# EAGLE board 04A-010-A101 (EAGLE 9.6.2)
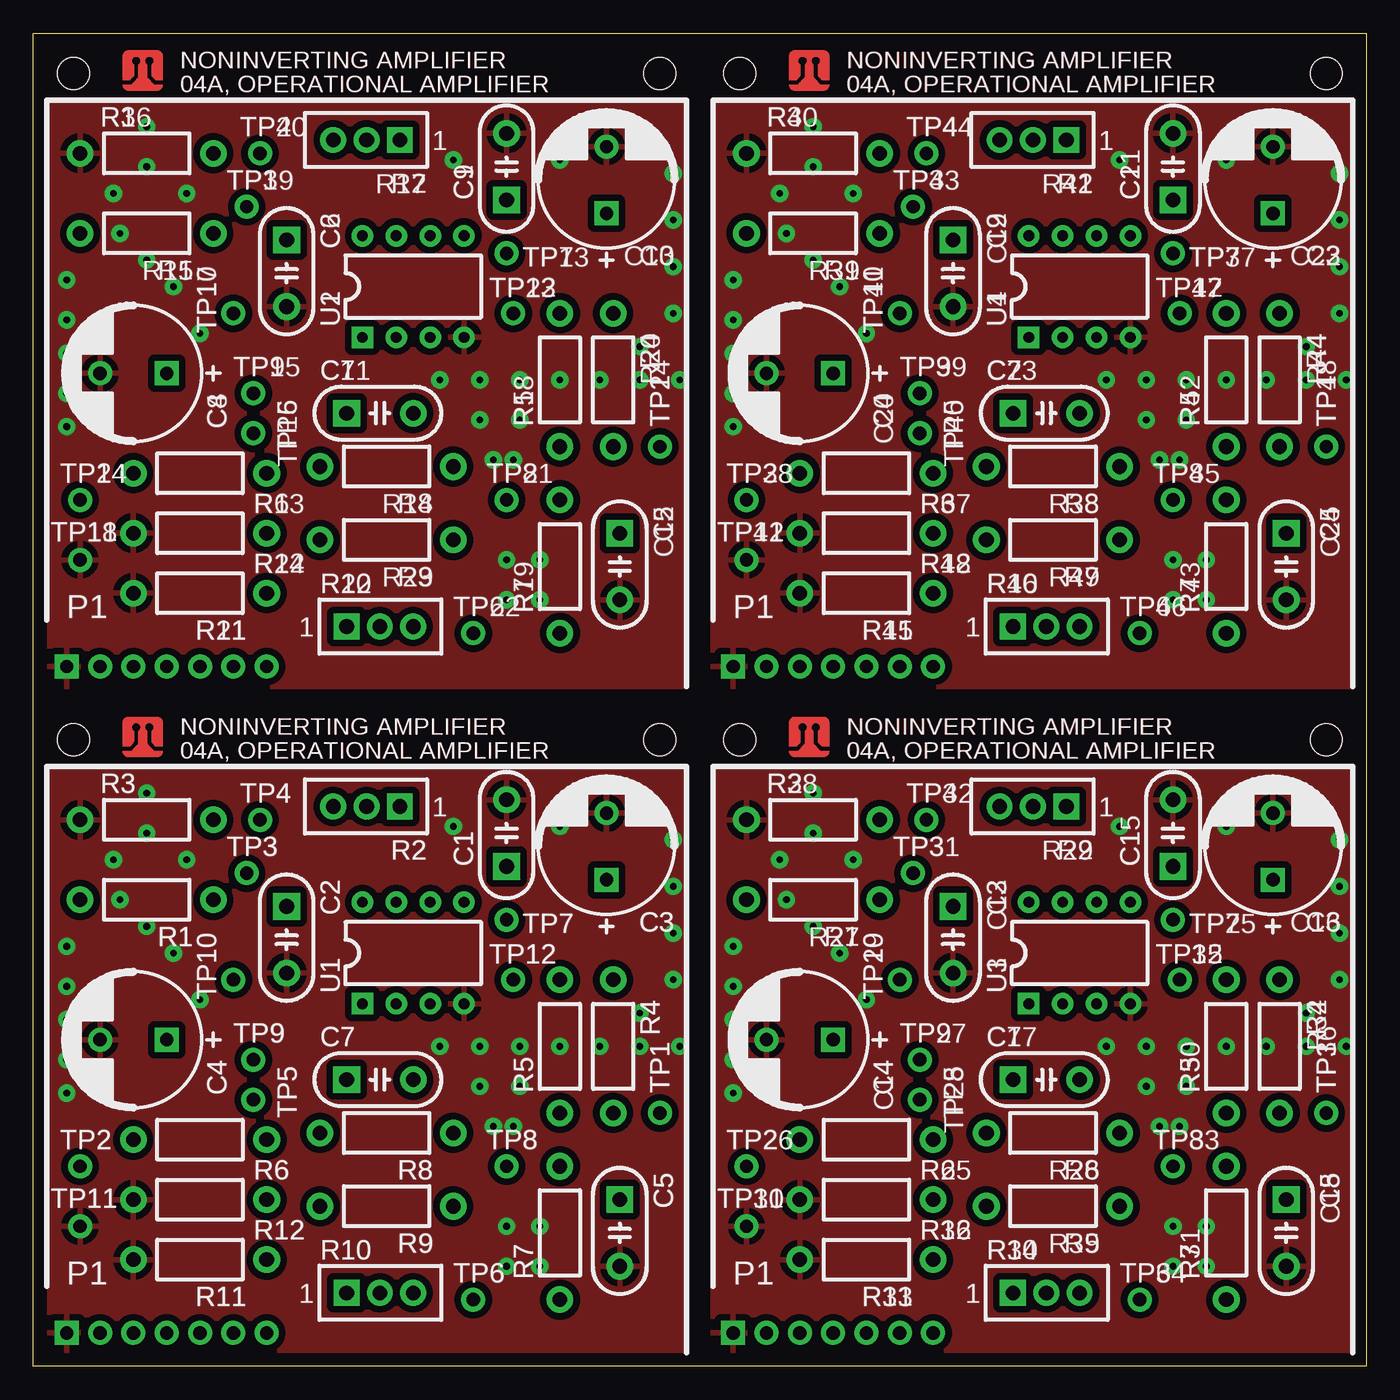
[diagram p0: board, top side]
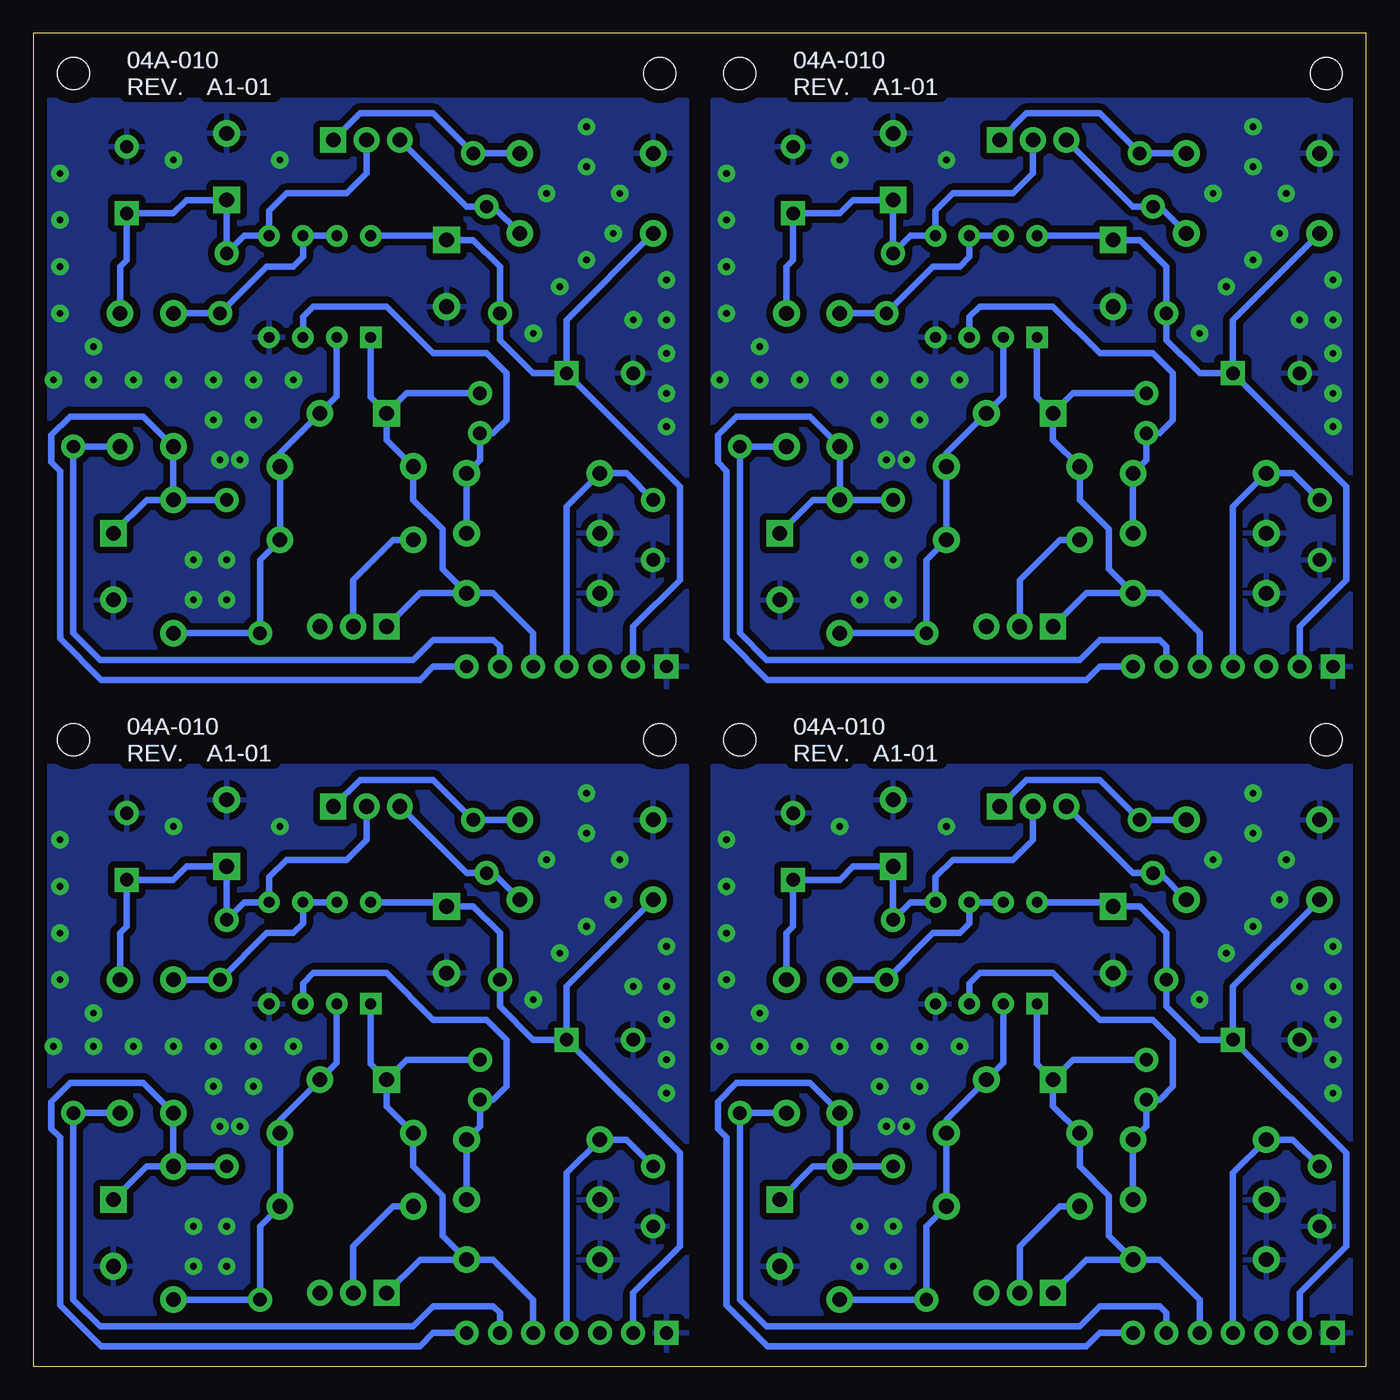
[diagram p1: board, bottom side, seen from below]

Size 100 x 100 mm. Coordinates in mm from the lower left corner, seen from the top.
Outline: 0,0 0,100 100,100 100,0 0,0
Copper layers (1*16): Top 0.035mm / dielectric 1.5mm / Bottom 0.035mm
Design rules "minipcb-THD": minimum track width 0.5mm, minimum drill 0.5mm, track to track 0.5mm, track to pad 0.5mm, pad to pad 0.5mm, via to via 0.5mm, smd to smd 0mil, copper to edge 1mm, drill to drill 1mm, minimum pad ring 0.4mm, minimum via ring 0.4mm, stop-mask expansion 0.1mm, vias tented up to drill 0.6mm, thermal gap 0.5mm

## Footprints (pad centres in the part's own frame; a part is rotated, then mirrored left to right if it is on the bottom)
C050-024X044 = drill 1.1 pad 2 square: 1 -2.5,0 | drill 1.1 pad 2: 2 2.5,0
C5MM = drill 1 square: + -2.5,0 | drill 1: - 2.5,0
PINS_1X7 = drill 1 square: 1 0,0 | drill 1: 2 2.5,0; 3 5,0; 4 7.5,0; 5 10,0; 6 12.5,0; 7 15,0
0207/10 = drill 1.1 pad 2: 1 -5,0; 2 5,0
TRIM_0100 = drill 1.1 pad 1.93 square: 1 0,0 | drill 1.1 pad 1.93: 2 2.5,0; 3 5,0
PINS_1_TESTPOINT_KE5000_NOTEXT = drill 1: 1 0,0
DIL08 = drill 0.813 square: 1 -3.81,-3.81 | drill 0.813: 2 -1.27,-3.81; 3 1.27,-3.81; 4 3.81,-3.81; 5 3.81,3.81; 6 1.27,3.81; 7 -1.27,3.81; 8 -3.81,3.81
MINIPCB_0P_50X50MM = hole 2.4: 47,47; 3,47

## Placement (x,y rotation side)
C1  [C050-024X044]  35.5,40 90 top
C2  [C050-024X044]  19,32 270 top
C3  [C5MM]  43,39 90 top
C4  [C5MM]  7.5,24.5 180 top
C5  [C050-024X044]  44,10 270 top
C6  [C050-024X044]  19,82 270 top
C7  [C050-024X044]  26,21.5 0 top
C8  [C5MM]  7.5,74.5 180 top
C9  [C050-024X044]  35.5,90 90 top
C10  [C5MM]  43,89 90 top
C11  [C050-024X044]  26,71.5 0 top
C12  [C050-024X044]  44,60 270 top
C13  [C050-024X044]  69,32 270 top
C14  [C5MM]  57.5,24.5 180 top
C15  [C050-024X044]  85.5,40 90 top
C16  [C5MM]  93,39 90 top
C17  [C050-024X044]  76,21.5 0 top
C18  [C050-024X044]  94,10 270 top
C19  [C050-024X044]  69,82 270 top
C20  [C5MM]  57.5,74.5 180 top
C21  [C050-024X044]  85.5,90 90 top
C22  [C5MM]  93,89 90 top
C23  [C050-024X044]  76,71.5 0 top
C24  [C050-024X044]  94,60 270 top
E$1  [MINIPCB_PANEL_IMAGEFRAME]  -25,-30 0 top  (outside the outline)
P1  [PINS_1X7]  2.5,2.5 0 top
P2  [PINS_1X7]  2.5,52.5 0 top
P3  [PINS_1X7]  52.5,2.5 0 top
P4  [PINS_1X7]  52.5,52.5 0 top
R1  [0207/10]  8.5,35 180 top
R2  [TRIM_0100]  27.5,42 180 top
R3  [0207/10]  8.5,41 0 top
R4  [0207/10]  43.5,24 270 top
R5  [0207/10]  39.5,24 90 top
R6  [0207/10]  12.5,17 180 top
R7  [0207/10]  39.5,10 90 top
R8  [0207/10]  26.5,17.5 180 top
R9  [0207/10]  26.5,12 180 top
R10  [TRIM_0100]  23.5,5.5 0 top
R11  [0207/10]  12.5,8 180 top
R12  [0207/10]  12.5,12.5 180 top
R13  [0207/10]  12.5,67 180 top
R14  [0207/10]  26.5,67.5 180 top
R15  [0207/10]  8.5,85 180 top
R16  [0207/10]  8.5,91 0 top
R17  [TRIM_0100]  27.5,92 180 top
R18  [0207/10]  39.5,74 90 top
R19  [0207/10]  39.5,60 90 top
R20  [0207/10]  43.5,74 270 top
R21  [0207/10]  12.5,58 180 top
R22  [TRIM_0100]  23.5,55.5 0 top
R23  [0207/10]  26.5,62 180 top
R24  [0207/10]  12.5,62.5 180 top
R25  [0207/10]  62.5,17 180 top
R26  [0207/10]  76.5,17.5 180 top
R27  [0207/10]  58.5,35 180 top
R28  [0207/10]  58.5,41 0 top
R29  [TRIM_0100]  77.5,42 180 top
R30  [0207/10]  89.5,24 90 top
R31  [0207/10]  89.5,10 90 top
R32  [0207/10]  93.5,24 270 top
R33  [0207/10]  62.5,8 180 top
R34  [TRIM_0100]  73.5,5.5 0 top
R35  [0207/10]  76.5,12 180 top
R36  [0207/10]  62.5,12.5 180 top
R37  [0207/10]  62.5,67 180 top
R38  [0207/10]  76.5,67.5 180 top
R39  [0207/10]  58.5,85 180 top
R40  [0207/10]  58.5,91 0 top
R41  [TRIM_0100]  77.5,92 180 top
R42  [0207/10]  89.5,74 90 top
R43  [0207/10]  89.5,60 90 top
R44  [0207/10]  93.5,74 270 top
R45  [0207/10]  62.5,58 180 top
R46  [TRIM_0100]  73.5,55.5 0 top
R47  [0207/10]  76.5,62 180 top
R48  [0207/10]  62.5,62.5 180 top
TP1  [PINS_1_TESTPOINT_KE5000_NOTEXT]  47,19 0 top
TP2  [PINS_1_TESTPOINT_KE5000_NOTEXT]  3.5,15 0 top
TP3  [PINS_1_TESTPOINT_KE5000_NOTEXT]  16,37 0 top
TP4  [PINS_1_TESTPOINT_KE5000_NOTEXT]  17,41 0 top
TP5  [PINS_1_TESTPOINT_KE5000_NOTEXT]  16.5,20 270 top
TP6  [PINS_1_TESTPOINT_KE5000_NOTEXT]  33,5 0 top
TP7  [PINS_1_TESTPOINT_KE5000_NOTEXT]  35.5,33.5 180 top
TP8  [PINS_1_TESTPOINT_KE5000_NOTEXT]  35.5,15 0 top
TP9  [PINS_1_TESTPOINT_KE5000_NOTEXT]  16.5,23 0 top
TP10  [PINS_1_TESTPOINT_KE5000_NOTEXT]  15,29 90 top
TP11  [PINS_1_TESTPOINT_KE5000_NOTEXT]  3.5,10.5 0 top
TP12  [PINS_1_TESTPOINT_KE5000_NOTEXT]  36,29 270 top
TP13  [PINS_1_TESTPOINT_KE5000_NOTEXT]  35.5,83.5 180 top
TP14  [PINS_1_TESTPOINT_KE5000_NOTEXT]  3.5,65 0 top
TP15  [PINS_1_TESTPOINT_KE5000_NOTEXT]  16.5,73 0 top
TP16  [PINS_1_TESTPOINT_KE5000_NOTEXT]  16.5,70 270 top
TP17  [PINS_1_TESTPOINT_KE5000_NOTEXT]  15,79 90 top
TP18  [PINS_1_TESTPOINT_KE5000_NOTEXT]  3.5,60.5 0 top
TP19  [PINS_1_TESTPOINT_KE5000_NOTEXT]  16,87 0 top
TP20  [PINS_1_TESTPOINT_KE5000_NOTEXT]  17,91 0 top
TP21  [PINS_1_TESTPOINT_KE5000_NOTEXT]  35.5,65 0 top
TP22  [PINS_1_TESTPOINT_KE5000_NOTEXT]  33,55 0 top
TP23  [PINS_1_TESTPOINT_KE5000_NOTEXT]  36,79 270 top
TP24  [PINS_1_TESTPOINT_KE5000_NOTEXT]  47,69 0 top
TP25  [PINS_1_TESTPOINT_KE5000_NOTEXT]  85.5,33.5 180 top
TP26  [PINS_1_TESTPOINT_KE5000_NOTEXT]  53.5,15 0 top
TP27  [PINS_1_TESTPOINT_KE5000_NOTEXT]  66.5,23 0 top
TP28  [PINS_1_TESTPOINT_KE5000_NOTEXT]  66.5,20 270 top
TP29  [PINS_1_TESTPOINT_KE5000_NOTEXT]  65,29 90 top
TP30  [PINS_1_TESTPOINT_KE5000_NOTEXT]  53.5,10.5 0 top
TP31  [PINS_1_TESTPOINT_KE5000_NOTEXT]  66,37 0 top
TP32  [PINS_1_TESTPOINT_KE5000_NOTEXT]  67,41 0 top
TP33  [PINS_1_TESTPOINT_KE5000_NOTEXT]  85.5,15 0 top
TP34  [PINS_1_TESTPOINT_KE5000_NOTEXT]  83,5 0 top
TP35  [PINS_1_TESTPOINT_KE5000_NOTEXT]  86,29 270 top
TP36  [PINS_1_TESTPOINT_KE5000_NOTEXT]  97,19 0 top
TP37  [PINS_1_TESTPOINT_KE5000_NOTEXT]  85.5,83.5 180 top
TP38  [PINS_1_TESTPOINT_KE5000_NOTEXT]  53.5,65 0 top
TP39  [PINS_1_TESTPOINT_KE5000_NOTEXT]  66.5,73 0 top
TP40  [PINS_1_TESTPOINT_KE5000_NOTEXT]  66.5,70 270 top
TP41  [PINS_1_TESTPOINT_KE5000_NOTEXT]  65,79 90 top
TP42  [PINS_1_TESTPOINT_KE5000_NOTEXT]  53.5,60.5 0 top
TP43  [PINS_1_TESTPOINT_KE5000_NOTEXT]  66,87 0 top
TP44  [PINS_1_TESTPOINT_KE5000_NOTEXT]  67,91 0 top
TP45  [PINS_1_TESTPOINT_KE5000_NOTEXT]  85.5,65 0 top
TP46  [PINS_1_TESTPOINT_KE5000_NOTEXT]  83,55 0 top
TP47  [PINS_1_TESTPOINT_KE5000_NOTEXT]  86,79 270 top
TP48  [PINS_1_TESTPOINT_KE5000_NOTEXT]  97,69 0 top
U1  [DIL08]  28.5,31 0 top
U2  [DIL08]  28.5,81 0 top
U3  [DIL08]  78.5,31 0 top
U4  [DIL08]  78.5,81 0 top
U$1  MINIPCB_50X50  [MINIPCB_0P_50X50MM]  0,0 0 top
U$2  MINIPCB_50X50  [MINIPCB_0P_50X50MM]  0,50 0 top
U$3  MINIPCB_50X50  [MINIPCB_0P_50X50MM]  50,0 0 top
U$4  MINIPCB_50X50  [MINIPCB_0P_50X50MM]  50,50 0 top

## Library data of the parts
C1-C24 E$1 P1-P4 R1-R48 TP1-TP48 U1-U4 = minipcb
U$1-U$4 = minipcb; CIRCUIT_CATEGORY: 04A, OPERATIONAL AMPLIFIER; PART_NUMBER: 04A-010; REVISION: A1-01; TITLE: NONINVERTING AMPLIFIER

## Nets
BIAS: C1.1 C3.+ R2.2 R4.1 TP7.1 U1.5
BIAS1: C9.1 C10.+ R17.2 R20.1 TP13.1 U2.5
BIAS2: C15.1 C16.+ R29.2 R32.1 TP25.1 U3.5
BIAS3: C21.1 C22.+ R41.2 R44.1 TP37.1 U4.5
BIAS_CONTROL: P1.6 R4.2 TP1.1
BIAS_CONTROL1: P2.6 R20.2 TP24.1
BIAS_CONTROL2: P3.6 R32.2 TP36.1
BIAS_CONTROL3: P4.6 R44.2 TP48.1
GND: C1.2 C2.2 C3.- C4.- C5.2 P1.1 R3.1 R11.2 R12.2 TP11.1 U1.4
GND1: C6.2 C8.- C9.2 C10.- C12.2 P2.1 R16.1 R21.2 R24.2 TP18.1 U2.4
GND2: C13.2 C14.- C15.2 C16.- C18.2 P3.1 R28.1 R33.2 R36.2 TP30.1 U3.4
GND3: C19.2 C20.- C21.2 C22.- C24.2 P4.1 R40.1 R45.2 R48.2 TP42.1 U4.4
IN: P1.4 R6.2 TP2.1
IN1: P2.4 R13.2 TP14.1
IN2: P3.4 R25.2 TP26.1
IN3: P4.4 R37.2 TP38.1
IN+: R6.1 R12.1 TP5.1 U1.3
IN+1: R13.1 R24.1 TP16.1 U2.3
IN+2: R25.1 R36.1 TP28.1 U3.3
IN+3: R37.1 R48.1 TP40.1 U4.3
N$1: R9.2 R10.2
N$2: R22.2 R23.2
N$3: R34.2 R35.2
N$4: R46.2 R47.2
NC: P1.3
NC1: P2.3
NC2: P3.3
NC3: P4.3
OUT: C7.1 P1.5 R8.2 R10.1 R11.1 TP9.1 U1.1
OUT1: C11.1 P2.5 R14.2 R21.1 R22.1 TP15.1 U2.1
OUT2: C17.1 P3.5 R26.2 R33.1 R34.1 TP27.1 U3.1
OUT3: C23.1 P4.5 R38.2 R45.1 R46.1 TP39.1 U4.1
POT.1: R2.1 R3.2 TP4.1
POT.2: R15.1 R17.3 TP19.1
POT.3: R1.1 R2.3 TP3.1
POT.4: R16.2 R17.1 TP20.1
POT.5: R27.1 R29.3 TP31.1
POT.6: R28.2 R29.1 TP32.1
POT.7: R39.1 R41.3 TP43.1
POT.8: R40.2 R41.1 TP44.1
V+: C2.1 C4.+ P1.2 R1.2 TP10.1 U1.8
V+1: C6.1 C8.+ P2.2 R15.2 TP17.1 U2.8
V+2: C13.1 C14.+ P3.2 R27.2 TP29.1 U3.8
V+3: C19.1 C20.+ P4.2 R39.2 TP41.1 U4.8
VFB: C7.2 R7.1 R8.1 R9.1 TP6.1 U1.2
VFB1: C11.2 R14.1 R19.1 R23.1 TP22.1 U2.2
VFB2: C17.2 R26.1 R31.1 R35.1 TP34.1 U3.2
VFB3: C23.2 R38.1 R43.1 R47.1 TP46.1 U4.2
VREF: R5.2 TP12.1 U1.6 U1.7
VREF1: R18.2 TP23.1 U2.6 U2.7
VREF2: R30.2 TP35.1 U3.6 U3.7
VREF3: R42.2 TP47.1 U4.6 U4.7
VREF_FILTERED: C5.1 P1.7 R5.1 R7.2 TP8.1
VREF_FILTERED1: C12.1 P2.7 R18.1 R19.2 TP21.1
VREF_FILTERED2: C18.1 P3.7 R30.1 R31.2 TP33.1
VREF_FILTERED3: C24.1 P4.7 R42.1 R43.2 TP45.1

## Tracks (layer width: path | path; a pad name or v marks a point on that pad's centre or on a via)
BIAS
  Bottom 0.5: R2.2 25,39.5 26.5,38 31,38 32.31,36.69 U1.5 34.19,34.81 TP7.1 C1.1 38.5,37.5 39.5,36.5 C3.+ 43,33 43.5,32.5 R4.1
BIAS1
  Bottom 0.5: R17.2 25,89.5 26.5,88 31,88 32.31,86.69 U2.5 34.19,84.81 TP13.1 C9.1 38.5,87.5 39.5,86.5 C10.+ 43,83 43.5,82.5 R20.1
BIAS2
  Bottom 0.5: R29.2 75,39.5 76.5,38 81,38 82.31,36.69 U3.5 84.19,34.81 TP25.1 C15.1 88.5,37.5 89.5,36.5 C16.+ 93,33 93.5,32.5 R32.1
BIAS3
  Bottom 0.5: R41.2 75,89.5 76.5,88 81,88 82.31,86.69 U4.5 84.19,84.81 TP37.1 C21.1 88.5,87.5 89.5,86.5 C22.+ 93,83 93.5,82.5 R44.1
BIAS_CONTROL
  Bottom 0.5: P1.6 15,4 15.5,4.5 20,4.5 21.5,3 45,3 47,5 TP1.1 R4.2 45.5,19
BIAS_CONTROL1
  Bottom 0.5: P2.6 15,54 15.5,54.5 20,54.5 21.5,53 45,53 47,55 TP24.1 R20.2 45.5,69
BIAS_CONTROL2
  Bottom 0.5: P3.6 65,4 65.5,4.5 70,4.5 71.5,3 95,3 97,5 TP36.1 R32.2 95.5,19
BIAS_CONTROL3
  Bottom 0.5: P4.6 65,54 65.5,54.5 70,54.5 71.5,53 95,53 97,55 TP48.1 R44.2 95.5,69
GND  (via drill 0.5)
  other vias: 30.5,24 33.5,24 36.5,24 39.5,24 42.5,24 45.5,24 48.5,24 33.5,21 36.5,21 34.5,18 36,18 45.5,26.5 48,29 48,32.5 48,36 48,39.5 2.5,20.5 2.5,23 2.5,26 2.5,28.5 2.5,31.5 5,28.5 8.5,43 8.5,40 6,38 8.5,33 10.5,31 12.5,27.5 35.5,7.5 38,7.5 35.5,10.5 38,10.5 31.5,40.5 39.5,40.5 6.5,35 11.5,38
  pour Top: 1,1 49,1 49,45 1,45
  pour Bottom: 1,1 49,1 49,45 1,45
GND1  (via drill 0.5)
  other vias: 30.5,74 33.5,74 36.5,74 39.5,74 42.5,74 45.5,74 48.5,74 33.5,71 36.5,71 34.5,68 36,68 45.5,76.5 48,79 48,82.5 48,86 48,89.5 2.5,70.5 2.5,73 2.5,76 2.5,78.5 2.5,81.5 5,78.5 8.5,93 8.5,90 6,88 8.5,83 10.5,81 12.5,77.5 35.5,57.5 38,57.5 35.5,60.5 38,60.5 31.5,90.5 39.5,90.5 6.5,85 11.5,88
  pour Top: 1,51 49,51 49,95 1,95
  pour Bottom: 1,51 49,51 49,95 1,95
GND2  (via drill 0.5)
  other vias: 80.5,24 83.5,24 86.5,24 89.5,24 92.5,24 95.5,24 98.5,24 83.5,21 86.5,21 84.5,18 86,18 95.5,26.5 98,29 98,32.5 98,36 98,39.5 52.5,20.5 52.5,23 52.5,26 52.5,28.5 52.5,31.5 55,28.5 58.5,43 58.5,40 56,38 58.5,33 60.5,31 62.5,27.5 85.5,7.5 88,7.5 85.5,10.5 88,10.5 81.5,40.5 89.5,40.5 56.5,35 61.5,38
  pour Top: 51,1 99,1 99,45 51,45
  pour Bottom: 51,1 99,1 99,45 51,45
GND3  (via drill 0.5)
  other vias: 80.5,74 83.5,74 86.5,74 89.5,74 92.5,74 95.5,74 98.5,74 83.5,71 86.5,71 84.5,68 86,68 95.5,76.5 98,79 98,82.5 98,86 98,89.5 52.5,70.5 52.5,73 52.5,76 52.5,78.5 52.5,81.5 55,78.5 58.5,93 58.5,90 56,88 58.5,83 60.5,81 62.5,77.5 85.5,57.5 88,57.5 85.5,60.5 88,60.5 81.5,90.5 89.5,90.5 56.5,85 61.5,88
  pour Top: 51,51 99,51 99,95 51,95
  pour Bottom: 51,51 99,51 99,95 51,95
IN
  Bottom 0.5: P1.4 10,14.5 R6.2 5.5,17 TP2.1
IN1
  Bottom 0.5: P2.4 10,64.5 R13.2 5.5,67 TP14.1
IN2
  Bottom 0.5: P3.4 60,14.5 R25.2 55.5,17 TP26.1
IN3
  Bottom 0.5: P4.4 60,64.5 R37.2 55.5,67 TP38.1
IN+
  Bottom 0.5: U1.3 29.77,28.73 29,29.5 23.5,29.5 20,26 16,26 14.5,24.5 14.5,21 15.5,20 TP5.1 16.5,18 R6.1 R12.1
IN+1
  Bottom 0.5: U2.3 29.77,78.73 29,79.5 23.5,79.5 20,76 16,76 14.5,74.5 14.5,71 15.5,70 TP16.1 16.5,68 R13.1 R24.1
IN+2
  Bottom 0.5: U3.3 79.77,28.73 79,29.5 73.5,29.5 70,26 66,26 64.5,24.5 64.5,21 65.5,20 TP28.1 66.5,18 R25.1 R36.1
IN+3
  Bottom 0.5: U4.3 79.77,78.73 79,79.5 73.5,79.5 70,76 66,76 64.5,74.5 64.5,71 65.5,70 TP40.1 66.5,68 R37.1 R48.1
N$1
  Bottom 0.5: R10.2 26,9 23,12 R9.2
N$2
  Bottom 0.5: R22.2 26,59 23,62 R23.2
N$3
  Bottom 0.5: R34.2 76,9 73,12 R35.2
N$4
  Bottom 0.5: R46.2 76,59 73,62 R47.2
OUT
  Bottom 0.5: P1.5 12.5,5 15.5,8 R11.1 | R10.1 21,8 R11.1 | U1.1 24.69,22.69 C7.1 | C7.1 23.5,19.5 R8.2 21.5,15 19.3,12.8 19.3,9.8 R11.1 | TP9.1 22,23 C7.1
OUT1
  Bottom 0.5: P2.5 12.5,55 15.5,58 R21.1 | R22.1 21,58 R21.1 | U2.1 24.69,72.69 C11.1 | C11.1 23.5,69.5 R14.2 21.5,65 19.3,62.8 19.3,59.8 R21.1 | TP15.1 22,73 C11.1
OUT2
  Bottom 0.5: P3.5 62.5,5 65.5,8 R33.1 | R34.1 71,8 R33.1 | U3.1 74.69,22.69 C17.1 | C17.1 73.5,19.5 R26.2 71.5,15 69.3,12.8 69.3,9.8 R33.1 | TP27.1 72,23 C17.1
OUT3
  Bottom 0.5: P4.5 62.5,55 65.5,58 R45.1 | R46.1 71,58 R45.1 | U4.1 74.69,72.69 C23.1 | C23.1 73.5,69.5 R38.2 71.5,65 69.3,62.8 69.3,59.8 R45.1 | TP39.1 72,73 C23.1
POT.1
  Bottom 0.5: R3.2 TP4.1 20,44 25.5,44 R2.1
POT.2
  Bottom 0.5: R15.1 15.5,87 TP19.1 17.5,87 R17.3
POT.3
  Bottom 0.5: R1.1 15.5,37 TP3.1 17.5,37 R2.3
POT.4
  Bottom 0.5: R16.2 TP20.1 20,94 25.5,94 R17.1
POT.5
  Bottom 0.5: R27.1 65.5,37 TP31.1 67.5,37 R29.3
POT.6
  Bottom 0.5: R28.2 TP32.1 70,44 75.5,44 R29.1
POT.7
  Bottom 0.5: R39.1 65.5,87 TP43.1 67.5,87 R41.3
POT.8
  Bottom 0.5: R40.2 TP44.1 70,94 75.5,94 R41.1
V+
  Bottom 0.5: P1.2 5,5.5 1.5,9 1.5,16 C4.+ | R1.2 10,28.5 C4.+ | C4.+ 12.5,24.5 15,27 TP10.1 15,32.5 17,34.5 C2.1 19.31,34.81 U1.8
V+1
  Bottom 0.5: P2.2 5,55.5 1.5,59 1.5,66 C8.+ | R15.2 10,78.5 C8.+ | C8.+ 12.5,74.5 15,77 TP17.1 15,82.5 17,84.5 C6.1 19.31,84.81 U2.8
V+2
  Bottom 0.5: P3.2 55,5.5 51.5,9 51.5,16 C14.+ | R27.2 60,28.5 C14.+ | C14.+ 62.5,24.5 65,27 TP29.1 65,32.5 67,34.5 C13.1 69.31,34.81 U3.8
V+3
  Bottom 0.5: P4.2 55,55.5 51.5,59 51.5,66 C20.+ | R39.2 60,78.5 C20.+ | C20.+ 62.5,74.5 65,77 TP41.1 65,82.5 67,84.5 C19.1 69.31,84.81 U4.8
VFB
  Bottom 0.5: U1.2 27.23,22.77 C7.2 31.5,18.5 R8.1 R9.1 33,10.5 TP6.1 R7.1
VFB1
  Bottom 0.5: U2.2 27.23,72.77 C11.2 31.5,68.5 R14.1 R23.1 33,60.5 TP22.1 R19.1
VFB2
  Bottom 0.5: U3.2 77.23,22.77 C17.2 81.5,18.5 R26.1 R35.1 83,10.5 TP34.1 R31.1
VFB3
  Bottom 0.5: U4.2 77.23,72.77 C23.2 81.5,68.5 R38.1 R47.1 83,60.5 TP46.1 R43.1
VREF
  Bottom 0.5: U1.7 U1.6 29.77,33.23 30.5,32.5 32.5,32.5 TP12.1 R5.2
VREF1
  Bottom 0.5: U2.7 U2.6 29.77,83.23 30.5,82.5 32.5,82.5 TP23.1 R18.2
VREF2
  Bottom 0.5: U3.7 U3.6 79.77,33.23 80.5,32.5 82.5,32.5 TP35.1 R30.2
VREF3
  Bottom 0.5: U4.7 U4.6 79.77,83.23 80.5,82.5 82.5,82.5 TP47.1 R42.2
VREF_FILTERED
  Bottom 0.5: P1.7 20,2.5 21,1.5 44.91,1.5 48,4.59 48,17.17 48.65,17.82 48.65,19.85 47.25,21.25 41.75,21.25 R5.1 R7.2 | TP8.1 R7.2 | R7.2 41.5,15 C5.1
VREF_FILTERED1
  Bottom 0.5: P2.7 20,52.5 21,51.5 44.91,51.5 48,54.59 48,67.17 48.65,67.82 48.65,69.85 47.25,71.25 41.75,71.25 R18.1 R19.2 | TP21.1 R19.2 | R19.2 41.5,65 C12.1
VREF_FILTERED2
  Bottom 0.5: P3.7 70,2.5 71,1.5 94.91,1.5 98,4.59 98,17.17 98.65,17.82 98.65,19.85 97.25,21.25 91.75,21.25 R30.1 R31.2 | TP33.1 R31.2 | R31.2 91.5,15 C18.1
VREF_FILTERED3
  Bottom 0.5: P4.7 70,52.5 71,51.5 94.91,51.5 98,54.59 98,67.17 98.65,67.82 98.65,69.85 97.25,71.25 91.75,71.25 R42.1 R43.2 | TP45.1 R43.2 | R43.2 91.5,65 C24.1

## Text on the board
_tNames: R3 | R3 | TP4 | TP4 | R2 | R2 | TP3 | C1 | TP3 | C1 | C2 | C2 | C3 | C3 | R1 | TP7 | R1 | TP7 | TP12 | TP12 | U1 | U1 | TP10 | R4 | TP10 | R4 | TP9 | C7 | TP9 | C7 | C4 | TP5 | C4 | TP5 | R5 | TP1 | R5 | TP1 | TP2 | TP8 | TP2 | TP8 | R8 | R8 | R6 | C5 | R6 | C5 | TP11 | TP11 | R12 | R9 | R12 | R9 | R10 | R10 | R7 | R7 | R11 | TP6 | R11 | TP6 | R3 | R3 | TP4 | TP4 | R2 | R2 | TP3 | C1 | TP3 | C1 | C2 | C2 | C3 | C3 | R1 | TP7 | R1 | TP7 | TP12 | TP12 | U1 | U1 | TP10 | R4 | TP10 | R4 | TP9 | C7 | TP9 | C7 | C4 | TP5 | C4 | TP5 | R5 | TP1 | R5 | TP1 | TP2 | TP8 | TP2 | TP8 | R8 | R8 | R6 | C5 | R6 | C5 | TP11 | TP11 | R12 | R9 | R12 | R9 | R10 | R10 | R7 | R7 | R11 | TP6 | R11 | TP6